# Altium PCB BearlyML Carrier Board.pcbdoc (part 2 of 2)
Units mil, origin at the board's own origin, x right, y up, seen from the top; angles counter-clockwise.
Board outline 9503.92 x 5409.44 mil, 6 copper layers (Top Layer, Mid-Layer 1, Mid-Layer 2, Mid-Layer 3, Mid-Layer 4, Bottom Layer); 88 components, 113 nets, 672 pads, 238 vias.
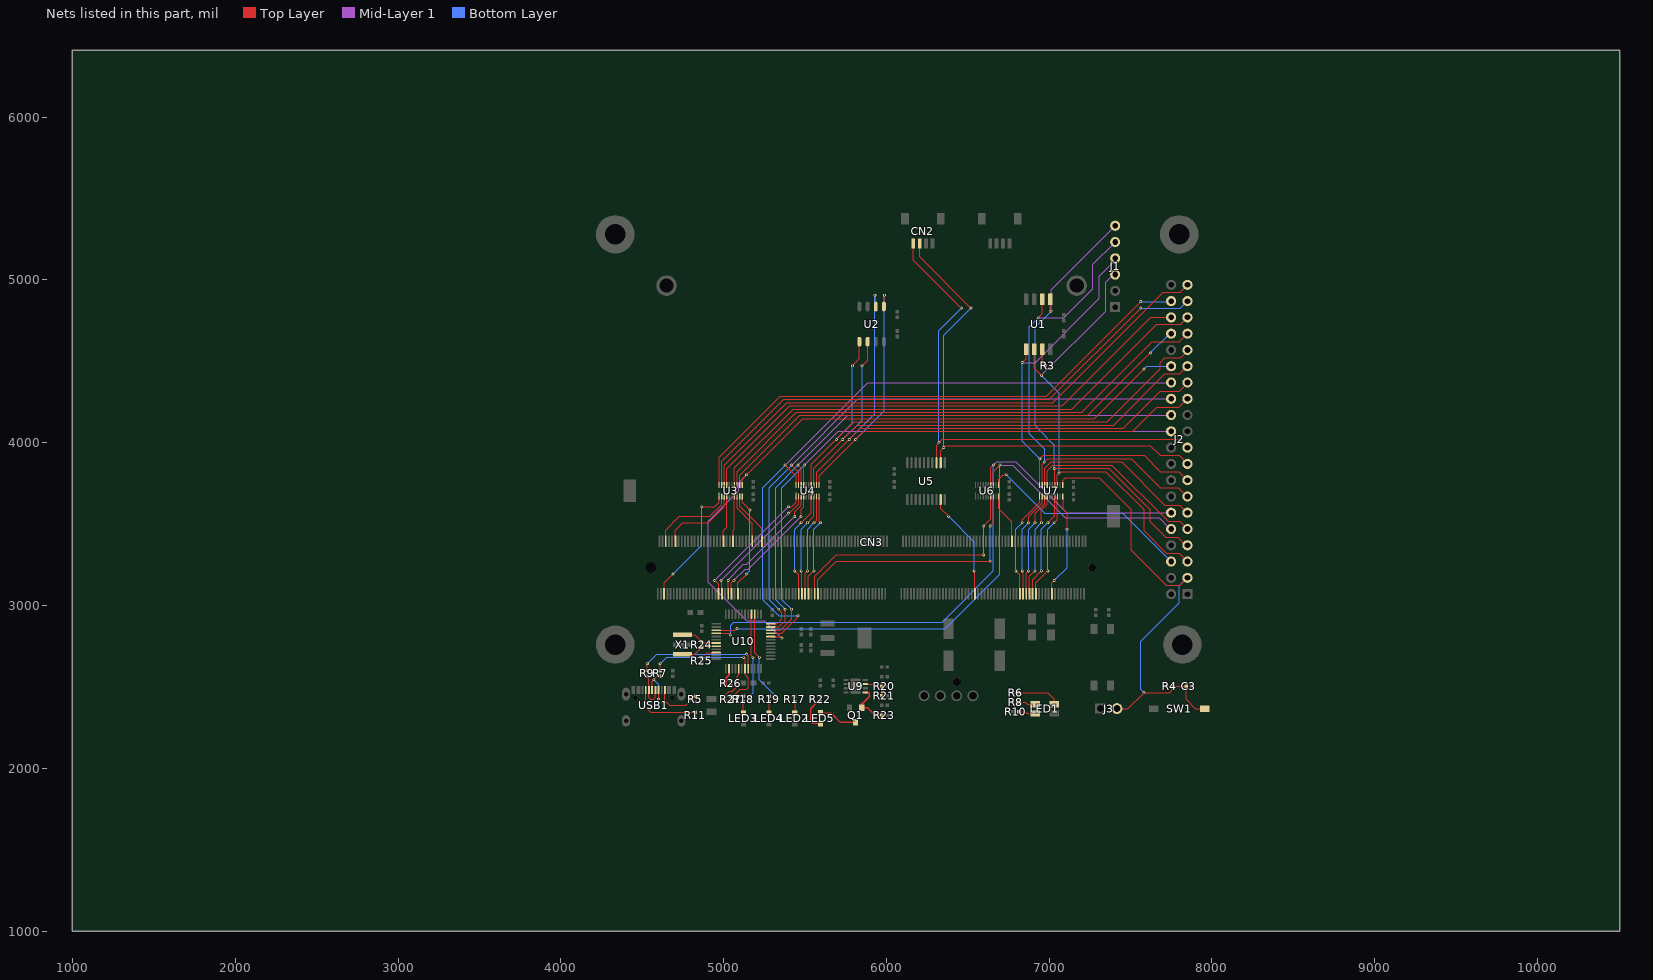
[diagram p6: the nets of this part, all layers, seen from the top]

## Via types
v1: diameter 17.72, hole 7.87, Top Layer to Bottom Layer, 238 vias

## Nets (pads, with @x,y where several pads share a name; then routed paths per layer and width w, separated by ;. In a path a pad name is that pad's centre, name@x,y a point inside that pad or via, vN(x,y) a via of type N, cw(c..) or ccw(c..) an arc to the next point about the centre after c; other vN are vias at no path point) (continued)
I2C1_SCL_3V3: CN2.4 J2.19 U5.13 | length 3086.9
  Top Layer w5.91: CN2.4@6165.33,5222.92 6165.33,5122.05 v1(6460.62,4826.76) ; U5.13@6308.07,3876.8 6308.07,3985.23 v1(6322.83,3999.99) ; v1@6322.84,3999.94 6342.51,4019.68 7799.24,4019.64 J2.19@7849.24,3969.64
  Bottom Layer w5.91: v1(6322.83,3999.99) 6322.83,4688.98 v1(6460.62,4826.76)
I2C1_SDA_1V8: CN3.191 U5.9 | length 665.1
  Top Layer w5.91: U5.9@6333.66,3650.74 6333.66,3595.46 v1(6381.88,3547.24) ; v1(6539.36,3212.59) 6544.28,3207.67 CN3.191@6544.28,3072.83
  Bottom Layer w5.91: v1(6381.88,3547.24) 6539.36,3389.76 v1(6539.36,3212.59)
I2C1_SDA_3V3: CN2.3 J2.17 U5.12 | length 3101.4
  Top Layer w5.91: CN2.3@6204.7,5222.92 6204.7,5141.74 v1(6519.68,4826.76) ; U5.12@6333.66,3876.8 6333.66,3951.78 v1(6352.35,3970.47) 6362.21,3980.33 7622.05,3980.33 7681.14,3921.24 7799.24,3921.24 7849.24,3871.24 J2.17@7849.24,3869.64
  Bottom Layer w5.91: v1(6352.35,3970.47) 6352.35,4659.44 v1(6519.68,4826.76)
JTAG_TCK_1V8: CN3.41 U4.2 | length 798.6
  Top Layer w5.91: v1(4984.25,3153.54) 4989.16,3148.62 CN3.41@4989.16,3072.83 ; v1(5397.63,3566.92) 5402.54,3566.94 5460.64,3625.04 U4.2@5460.59,3669.24
  Mid-Layer 1 w5.91: v1(4984.25,3153.54) v1(5397.63,3566.92)
JTAG_TCK_3V3: J2.26 U4.19 U10.24 | length 3756.3
  Top Layer w5.91: U10.24@5289.36,2887.81 5328.74,2887.8 5358.26,2917.32 5358.26,2956.69 v1(5338.58,2976.37) ; v1(5417.32,3862.2) 5460.62,3818.89 U4.19@5460.62,3740.16
  Mid-Layer 1 w5.91: v1(5417.32,3862.2) 5824.79,4269.68 J2.26@7749.2,4269.68
  Bottom Layer w5.91: v1(5338.58,2976.37) 5279.52,3035.43 5279.52,3468.5 5279.52,3724.41 v1(5417.32,3862.2)
JTAG_TDI_1V8: CN3.45 U4.3 | length 793.4
  Top Layer w5.91: CN3.45@5028.53,3072.83 v1(5028.53,3153.54) ; v1(5437,3547.24) 5437.04,3576.84 5476.34,3616.14 U4.3@5476.34,3669.24
  Mid-Layer 1 w5.91: v1(5028.53,3153.54) 5028.54,3158.44 5122.04,3251.94 5141.74,3251.94 v1(5437,3547.24)
JTAG_TDI_3V3: J2.24 U4.18 U10.23 | length 3691.2
  Top Layer w5.91: U10.23@5289.34,2868.14 5338.54,2868.14 5377.94,2907.44 v1@5377.94,2976.34 ; v1(5456.69,3862.2) 5476.37,3842.52 U4.18@5476.37,3740.16
  Mid-Layer 1 w5.91: v1(5456.69,3862.2) 5764.16,4169.68 J2.24@7749.2,4169.68
  Bottom Layer w5.91: v1@5377.95,2976.38 5318.89,3035.43 5318.89,3724.4 v1(5456.69,3862.2)
  other v1: 5377.95,2976.37
JTAG_TDO_1V8: CN3.47 U4.4 | length 791.9
  Top Layer w5.91: CN3.47@5048.21,3072.83 5048.21,3138.76 v1(5062.99,3153.54) ; v1@5476.34,3547.24 5476.34,3591.54 5492.14,3607.34 U4.4@5492.08,3669.24
  Mid-Layer 1 w5.91: v1@5062.94,3153.54 5131.84,3222.44 5151.54,3222.44 v1@5476.34,3547.24
  other v1: 5476.37,3547.24
JTAG_TDO_3V3: J2.22 U4.17 U10.22 | length 3645.7
  Top Layer w5.91: U10.22@5289.36,2848.44 5348.43,2848.43 5397.63,2897.64 5417.31,2917.32 v1(5417.32,2976.37) ; U4.17@5492.12,3740.16 5492.12,3858.26 v1(5496.06,3862.2)
  Mid-Layer 1 w5.91: v1(5496.06,3862.2) 5703.53,4069.67 J2.22@7749.2,4069.67
  Bottom Layer w5.91: v1(5417.32,2976.37) 5358.26,3035.43 5358.26,3625.98 5358.26,3724.4 v1(5496.06,3862.2)
JTAG_TMS_1V8: CN3.39 U4.1 | length 827.2
  Top Layer w5.91: v1(4944.88,3153.54) 4969.47,3128.95 CN3.39@4969.47,3072.83 ; v1(5397.63,3606.29) 5417.34,3606.34 5444.84,3633.84 U4.1@5444.84,3671.21
  Mid-Layer 1 w5.91: v1(4944.88,3153.54) v1(5397.63,3606.29)
JTAG_TMS_3V3: J2.28 U4.20 U10.21 | length 4090.4
  Top Layer w5.91: U10.21@5289.34,2828.74 5358.24,2828.74 5456.74,2927.14 v1(5456.69,2937) ; v1(5377.95,3862.2) 5417.32,3822.83 5444.88,3795.26 U4.20@5444.88,3740.16
  Mid-Layer 1 w5.91: v1@5377.94,3862.2 5885.42,4369.68 J2.28@7749.2,4369.68
  Bottom Layer w5.91: v1@5377.94,3862.24 5240.14,3724.44 5240.14,3035.44 5338.54,2937.04 v1@5456.64,2937.04
JTAG_TRST_1V8: CN3.51 U3.10 | length 646.6
  Top Layer w5.91: CN3.51@5087.58,3072.83 5087.58,3138.76 v1(5141.73,3192.91) ; U3.10@5114.16,3669.28 5114.16,3633.86 v1(5161.41,3586.61)
  Bottom Layer w5.91: v1(5141.73,3192.91) 5161.41,3212.59 v1(5161.41,3586.61)
JTAG_TRST_3V3: J2.30 U3.11 U10.20 | length 4383.7
  Top Layer w5.91: U3.11@5114.14,3740.14 5114.14,3775.54 5486.24,4147.64 7277.54,4147.64 v1@7582.64,4452.74 ; U10.20@5289.37,2809.04 5348.41,2809.04 v1(5358.26,2799.21)
  Mid-Layer 1 w5.91: v1(5141.73,3803.14) 5092.52,3753.93 5092.52,3704.73 4905.5,3517.71 4905.5,3143.7 5141.72,2907.48 5249.99,2907.48 v1(5358.26,2799.21)
  Bottom Layer w5.91: v1(7582.67,4452.75) 7599.56,4469.64 J2.30@7749.24,4469.64
Q1_3: LED5.2 Q1.3 | length 240.2
  Top Layer w9.84: LED5.2@5594.48,2338.58 5661.4,2338.59 5718.49,2281.49 Q1.3@5811.02,2281.5
QSPI0_CS_1V8: CN3.227 U7.7 | length 653.1
  Top Layer w5.91: CN3.227@6898.61,3072.83 6898.61,3158.45 v1(6952.75,3212.59) ; v1(6992.12,3507.87) 7035.43,3551.18 U7.7@7035.43,3669.28
  Bottom Layer w5.91: v1(6952.75,3212.59) 6952.75,3468.5 v1(6992.12,3507.87)
QSPI0_CS_3V3: J1.6 J2.7 U1.1 U7.14 | length 2980.2
  Top Layer w5.91: U1.1@7008.02,4881.92 7008.02,4810.85 v1(7011.76,4807.12) ; v1(7031.49,3842.51) 7035.44,3838.56 U7.14@7035.43,3740.11 ; v1(7031.49,3842.51) 7366.14,3842.54 7622.04,3586.64 7622.04,3512.84 7715.54,3419.24 7789.34,3419.24 7838.94,3369.64 J2.7@7849.24,3369.64
  Mid-Layer 1 w5.91: v1(7011.76,4807.12) 7011.76,4938.86 J1.6@7405.54,5332.64
  Bottom Layer w5.91: v1@7011.74,4807.16 6913.34,4708.76 6913.34,4103.36 7031.54,3985.16 v1(7031.49,3842.51)
QSPI0_DQ0_1V8: CN3.219 U7.1 | length 669
  Top Layer w5.91: v1(6795.27,3212.59) 6819.87,3187.99 CN3.219@6819.87,3072.83 ; v1@6834.64,3507.84 6834.64,3527.54 6940.94,3633.84 U7.1@6940.94,3671.21
  Bottom Layer w5.91: v1(6795.27,3212.59) 6795.27,3468.51 v1(6834.64,3507.87)
QSPI0_DQ0_3V3: J1.4 J2.15 U1.5 U7.20 | length 2790.5
  Top Layer w5.91: v1(6834.6,4492.16) 6858.03,4515.59 U1.5@6858.03,4574.84 ; U7.20@6940.94,3740.11 6940.94,3899.61 v1(6942.9,3901.57) 6962.59,3921.26 7582.66,3921.26 7681.08,3822.84 7796.04,3822.84 J2.15@7849.24,3769.64
  Mid-Layer 1 w5.91: v1(6834.6,4492.16) 6913.44,4492.16 7307.04,4885.76 7307.04,5023.56 7405.54,5122.06 J1.4@7405.54,5132.66
  Bottom Layer w5.91: v1(6834.6,4492.16) 6834.6,4009.87 v1(6942.9,3901.57)
QSPI0_DQ1_1V8: CN3.221 U7.2 | length 649
  Top Layer w5.91: v1(6834.64,3212.59) 6839.55,3207.68 CN3.221@6839.55,3072.83 ; v1@6874.04,3507.84 6874.04,3547.24 6956.64,3629.94 U7.2@6956.64,3669.24
  Bottom Layer w5.91: v1(6834.64,3212.59) 6834.64,3468.5 v1(6874.01,3507.87)
QSPI0_DQ1_3V3: J1.5 J2.13 U1.2 U7.19 | length 2953.8
  Top Layer w5.91: v1@6933.02,4767.75 6958.02,4792.75 U1.2@6958.02,4881.92 ; U7.19@6956.64,3740.14 6956.64,3866.09 v1(6972.43,3881.88) 6992.12,3901.57 7503.93,3901.57 7681.06,3724.44 7794.44,3724.44 J2.13@7849.24,3669.64
  Mid-Layer 1 w5.91: v1(6933.02,4767.75) 7090.54,4767.76 7267.74,4944.86 7267.74,5094.76 J1.5@7405.54,5232.66
  Bottom Layer w5.91: v1(6933.02,4767.75) 6878.94,4713.66 6878.94,4054.16 6972.44,3960.66 v1(6972.43,3881.88)
QSPI0_DQ2_1V8: CN3.223 U7.3 | length 643.5
  Top Layer w5.91: CN3.223@6859.24,3072.64 6859.24,3197.84 v1@6874.04,3212.54 ; v1@6913.34,3507.84 6913.34,3566.84 6972.44,3625.94 U7.3@6972.44,3669.24
  Bottom Layer w5.91: v1(6874.01,3212.59) 6874.01,3468.5 v1(6913.38,3507.87)
QSPI0_DQ2_3V3: J2.11 U7.18 | length 1124.7
  Top Layer w5.91: U7.18@6972.44,3740.11 6972.44,3842.54 7011.84,3881.84 7444.84,3881.84 7710.64,3616.14 7802.74,3616.14 J2.11@7849.24,3569.64
QSPI0_DQ3_1V8: CN3.225 U7.4 | length 641.7
  Top Layer w5.91: CN3.225@6878.92,3072.83 6878.92,3178.13 v1(6913.38,3212.59) ; v1@6952.74,3507.84 6952.74,3586.64 6988.14,3622.04 U7.4@6988.14,3669.24
  Bottom Layer w5.91: v1(6913.38,3212.59) 6913.38,3468.5 v1(6952.75,3507.87)
QSPI0_DQ3_3V3: J2.9 U7.17 | length 1126.1
  Top Layer w5.91: U7.17@6988.18,3740.15 6988.18,3828.74 7021.64,3862.2 7385.81,3862.2 7730.3,3517.71 7801.16,3517.71 J2.9@7849.2,3469.67
QSPI0_SCLK_1V8: CN3.229 U7.8 | length 651.5
  Top Layer w5.91: CN3.229@6918.29,3072.83 6918.29,3138.76 v1(6992.12,3212.59) ; v1(7031.49,3507.87) 7051.17,3527.55 U7.8@7051.17,3669.28
  Bottom Layer w5.91: v1(6992.12,3212.59) 6992.12,3468.5 v1(7031.49,3507.87)
QSPI0_SCLK_3V3: J1.3 J2.5 U1.6 U7.13 | length 2811.7
  Top Layer w5.91: U1.6@6908.03,4574.84 6908.03,4458.1 v1(6952.71,4413.42) ; U7.13@7051.18,3740.11 7051.18,3803.16 v1(7061.01,3812.99) ; v1@7061.04,3812.94 7070.84,3822.84 7346.44,3822.84 7582.64,3586.64 7582.64,3458.64 7720.44,3320.84 7798.04,3320.84 J2.5@7849.24,3269.64
  Mid-Layer 1 w5.91: v1(6952.71,4413.42) 7346.45,4807.16 7346.45,4984.24 7394.84,5032.64 J1.3@7405.54,5032.64
  Bottom Layer w5.91: v1(6952.71,4413.42) 7061.01,4305.12 v1(7061.01,3812.99)
R3_1: R3.1 U1.7 | length 109.4
  Top Layer w5.91: U1.7@6958.02,4574.84 6958.02,4489.48 R3.1@6975.03,4472.47
R5_1: R5.1 USB1.B5 | length 301.9
  Top Layer w5.91: USB1.B5@4639.74,2480.94 4639.74,2415.34 4669.24,2385.84 4767.74,2385.84 4787.44,2405.54 4787.44,2425.24 4807.04,2444.84 4824.14,2444.84 R5.1@4826.74,2442.24
R6_1: LED1.3 R6.1 | length 266.9
  Top Layer w5.91: R6.1@6812.28,2464.54 6992.14,2464.54 7031.44,2425.24 LED1.3@7031.44,2393.74
R7_1: R7.1 USB1.A6 USB1.B6 | length 301.1
  Top Layer w5.91: USB1.A6@4561.02,2480.91 4561.02,2533.46 v1(4570.86,2543.3) 4593.2,2565.64 R7.1@4610.23,2565.64 ; v1(4600.39,2425.19) USB1.B6@4600.39,2480.91
  Bottom Layer w5.91: v1(4570.86,2543.3) 4600.39,2513.78 v1(4600.39,2425.19)
R8_1: LED1.1 R8.1 | length 106
  Top Layer w5.91: R8.1@6812.28,2405.54 6854.32,2405.51 6866.13,2393.7 LED1.1@6913.39,2393.7
R9_1: R9.1 USB1.A7 USB1.B7 | length 228.1
  Top Layer w5.91: R9.1@4531.54,2565.6 4541.33,2555.8 USB1.B7@4541.33,2480.91 4541.33,2435.04 4551.18,2425.2 4570.86,2425.2 4580.7,2435.03 USB1.A7@4580.7,2480.91
R10_1: LED1.2 R10.1 | length 104.3
  Top Layer w5.91: R10.1@6812.28,2346.44 6854.32,2346.45 6862.19,2338.58 LED1.2@6913.39,2338.58
R11_1: R11.1 USB1.A5 | length 423.4
  Top Layer w5.91: USB1.A5@4521.65,2480.91 4521.65,2375.98 4553.82,2343.81 R11.1@4826.77,2343.81
R17_2: LED2.2 R17.2 | length 69.6
  Top Layer w5.91: LED2.2@5437,2338.59 R17.2@5437.04,2408.2
R18_2: LED3.2 R18.2 | length 69.6
  Top Layer w5.91: LED3.2@5122.04,2338.58 R18.2@5122.04,2408.2
R19_2: LED4.2 R19.2 | length 69.6
  Top Layer w5.91: LED4.2@5279.52,2338.58 R19.2@5279.54,2408.2
R21_2: R20.1 R21.2 U9.7 | length 165.7
  Top Layer w5.91: U9.7@5869.8,2516.76 5916.31,2516.75 5929.12,2503.93 R20.1@5971.1,2503.94 ; R21.2@5971.14,2444.88 R20.1@5971.1,2503.94
R22_1: LED5.1 R22.1 | length 219.1
  Top Layer w9.84: LED5.1@5594.48,2275.59 5547.24,2275.59 5535.43,2287.4 5535.43,2366.14 5577.44,2408.16 R22.1@5594.48,2408.16
R23_1: Q1.1 R23.1 U9.5 | length 275.4
  Top Layer w9.84: Q1.1@5848.42,2372.05 5883.85,2372.05 5929.12,2326.77 R23.1@5971.14,2326.76
  Top Layer w11.81: Q1.1@5848.44,2372.06 5848.44,2393.66 5894.64,2439.96 5894.64,2459.66 5888.74,2465.56 U9.5@5869.8,2465.57
R24_1: R24.1 U10.43 X1.1 | length 227.1
  Top Layer w5.91: X1.1@4748.05,2818.9 4824.13,2818.89 R24.1@4866.14,2776.88 4873.33,2769.69 U10.43@4954.72,2769.7
R24_2: R24.2 U10.44 X1.3 | length 227.1
  Top Layer w5.91: X1.3@4748.05,2700.79 4824.12,2700.78 R24.2@4866.14,2742.8 4873.34,2750 U10.44@4954.72,2750.01
R25_2: R25.2 U10.46 | length 101.9
  Top Layer w5.91: R25.2@4866.14,2678.48 4898.3,2710.63 U10.46@4954.72,2710.64
R26_2: R26.2 U10.2 | length 139.1
  Top Layer w11.81: U10.2@5033.46,2612.22 5033.47,2572.84 5013.77,2553.15 5013.77,2513.78 5020.98,2506.57 R26.2@5043.34,2506.6
R27_2: R27.2 U10.5 | length 267.9
  Top Layer w5.91: R27.2@5043.34,2408.14 5030.84,2408.14 5013.74,2425.24 5013.74,2454.74 5033.44,2474.44 5053.14,2474.44 5082.64,2503.94 5082.64,2562.94 5092.54,2572.84 U10.5@5092.51,2612.22
RESET_1V8: CN3.239 U7.10 | length 646.6
  Top Layer w5.91: CN3.239@7016.72,3072.83 7016.72,3138.78 v1(7031.49,3153.54) ; U7.10@7082.66,3669.28 7082.67,3594.48 7110.22,3566.93 v1(7110.22,3468.5)
  Bottom Layer w5.91: v1(7031.49,3153.54) 7110.22,3232.27 v1(7110.22,3468.5)
RESET_3V3: C3.2 J2.3 J3.2 R4.2 SW1.1 U7.11 | length 2780.9
  Top Layer w5.91: U7.11@7082.64,3740.14 7082.64,3765.74 7100.34,3783.44 7307.14,3783.44 7503.94,3586.64 7503.94,3340.54 7720.44,3124.04 7803.54,3124.04 J2.3@7849.24,3169.64 ; J3.2@7416.14,2366.14 7484.24,2366.14 7582.64,2464.54 7740.14,2464.54 7757.14,2481.64 R4.2@7757.14,2503.94 ; R4.2@7757.19,2503.93 C3.2@7841.2,2503.94 7841.21,2422.55 7897.62,2366.14 SW1.1@7954.71,2366.14
  Bottom Layer w5.91: v1(7582.67,2464.56) 7562.98,2484.25 7562.98,2779.53 7799.2,3015.74 7799.2,3119.67 J2.3@7849.2,3169.67
RXLED: R18.1 U10.28 | length 554.7
  Top Layer w5.91: R18.1@5122.04,2442.24 5124.68,2444.88 v1(5161.41,2444.88) ; U10.28@5171.25,2946.85 5171.25,2690.95 v1(5181.1,2681.1)
  Bottom Layer w5.91: v1(5161.41,2444.88) 5181.1,2464.57 v1(5181.1,2681.1)
S$50: 
S$54: 
S$56: 
S$58: 
S$17923: 
S$36663: 
S$36667: 
S$36675: 
S$64641: 
SPI1_CS_1V8: CN3.95 U4.10 | length 630.3
  Top Layer w5.91: CN3.95@5520.65,3072.83 5520.65,3178.14 v1(5555.11,3212.59) ; U4.10@5586.61,3669.29 5586.61,3515.74 v1(5594.48,3507.87)
  Bottom Layer w5.91: v1(5555.11,3212.59) 5555.11,3468.5 v1(5594.48,3507.87)
SPI1_CS_3V3: J2.25 U2.1 U4.11 | length 3546.5
  Top Layer w5.91: U4.11@5586.57,3740.11 5586.64,3795.3 v1(5811.02,4019.68) 5860.28,4068.94 7513.74,4068.94 7661.44,4216.54 7796.04,4216.54 J2.25@7849.24,4269.64 ; U2.1@5984.44,4833.95 5988.18,4837.69 v1(5988.18,4905.5)
  Bottom Layer w5.91: v1(5811.02,4019.68) 5988.18,4196.84 v1(5988.18,4905.5)
SPI1_MISO_1V8: CN3.93 U4.9 | length 625.4
  Top Layer w5.91: CN3.93@5500.97,3072.83 5500.97,3197.82 v1(5515.74,3212.59) ; v1(5555.11,3507.87) 5570.86,3523.62 U4.9@5570.86,3669.29
  Bottom Layer w5.91: v1(5515.74,3212.59) 5515.74,3468.5 v1(5555.11,3507.87)
SPI1_MISO_3V3: J2.27 U2.2 U4.12 | length 3612.8
  Top Layer w5.91: U4.12@5570.82,3740.11 5570.84,3818.87 v1(5771.65,4019.68) 5840.51,4088.54 7454.74,4088.54 7681.14,4314.94 7799.24,4314.94 7849.24,4364.94 J2.27@7849.24,4369.64 ; v1(5929.13,4905.5) 5934.44,4900.19 U2.2@5934.44,4833.95
  Bottom Layer w5.91: v1(5771.65,4019.68) 5929.13,4177.16 v1(5929.13,4905.5)
SPI1_MOSI_1V8: CN3.89 U4.7 | length 649
  Top Layer w5.91: v1(5437,3212.59) 5461.6,3187.99 CN3.89@5461.6,3072.83 ; v1(5476.37,3507.87) 5539.36,3570.86 U4.7@5539.36,3669.29
  Bottom Layer w5.91: v1(5437,3212.59) 5437,3468.5 v1(5476.37,3507.87)
SPI1_MOSI_3V3: J2.31 U2.5 U4.14 | length 3416.6
  Top Layer w5.91: U4.14@5539.33,3740.11 5539.34,3866.11 v1(5692.91,4019.68) ; v1@5692.94,4019.64 5801.14,4127.94 7356.24,4127.94 7681.14,4452.74 7681.14,4492.14 7710.64,4521.64 7809.04,4521.64 7849.24,4561.84 J2.31@7849.24,4569.64 ; v1(5791.33,4472.43) 5834.44,4515.55 U2.5@5834.44,4622.73
  Bottom Layer w5.91: v1(5692.91,4019.68) 5791.33,4118.1 v1(5791.33,4472.43)
SPI1_SCLK_1V8: CN3.91 U4.8 | length 631.1
  Top Layer w5.91: v1(5476.37,3212.59) 5481.28,3207.68 CN3.91@5481.28,3072.83 ; v1(5515.74,3507.87) 5555.11,3547.24 U4.8@5555.11,3669.28
  Bottom Layer w5.91: v1(5476.37,3212.59) 5476.37,3468.5 v1(5515.74,3507.87)
SPI1_SCLK_3V3: J2.29 U2.6 U4.13 | length 3322.3
  Top Layer w5.91: U4.13@5555.08,3740.11 5555.14,3842.54 v1(5732.28,4019.68) 5820.84,4108.24 7395.64,4108.24 7710.64,4423.24 7802.74,4423.24 J2.29@7849.24,4469.64 ; v1(5850.39,4472.43) 5884.44,4506.49 U2.6@5884.44,4622.73
  Bottom Layer w5.91: v1(5732.28,4019.68) 5850.39,4137.79 v1(5850.39,4472.43)
SYS_CLK_EXT_1V8: CN3.214 U6.10 | length 307.4
  Top Layer w5.91: U6.10@6688.97,3669.28 6688.97,3594.49 6770.66,3512.79 CN3.214@6770.66,3395.67
SYS_CLK_EXT_3V3: J2.6 U6.11 | length 1328.1
  Top Layer w5.91: U6.11@6688.94,3740.14 6688.94,3775.54 6716.54,3803.14 v1(6736.21,3803.14)
  Bottom Layer w5.91: v1(6736.21,3803.14) 6972.44,3566.94 7451.94,3566.94 J2.6@7749.24,3269.64
TL_CLK_1V8: CN3.12 U3.3 | length 490.1
  Top Layer w5.91: CN3.12@4703.74,3395.64 4703.74,3463.54 4748.04,3507.84 4905.44,3507.84 5003.94,3606.34 U3.3@5003.94,3669.24
TL_CLK_3V3: J2.39 U3.18 | length 3426.1
  Top Layer w5.91: U3.18@5003.94,3740.11 5003.94,3862.24 5387.74,4246.04 7021.64,4246.04 7700.74,4925.14 7804.74,4925.14 J2.39@7849.24,4969.64
TL_IN_DAT_1V8: CN3.6 U3.2 | length 525.4
  Top Layer w5.91: CN3.6@4644.64,3395.64 4644.64,3463.54 4728.34,3547.24 4915.34,3547.24 4988.14,3620.04 U3.2@4988.14,3669.24
TL_IN_DAT_3V3: J2.37 U3.19 | length 3414.2
  Top Layer w5.91: U3.19@4988.14,3740.14 4988.14,3885.74 5368.14,4265.74 7001.94,4265.74 v1@7562.94,4826.74
  Bottom Layer w5.91: v1(7562.98,4826.76) 7806.29,4826.77 J2.37@7849.2,4869.68
TL_IN_RDY_1V8: CN3.60 U3.8 | length 312.3
  Top Layer w5.91: U3.8@5082.64,3669.24 5082.64,3596.44 5176.14,3502.94 CN3.60@5176.14,3395.64
TL_IN_RDY_3V3: J2.33 U3.13 | length 3200.1
  Top Layer w5.91: U3.13@5082.64,3740.14 5082.64,3822.84 5446.84,4187.04 7198.84,4187.04 7631.84,4620.04 7799.64,4620.04 J2.33@7849.24,4669.64
TL_IN_VAL_1V8: CN3.48 U3.7 | length 277.3
  Top Layer w5.91: CN3.48@5058.04,3395.64 5058.04,3463.54 5066.94,3472.44 U3.7@5066.93,3669.24
TL_IN_VAL_3V3: J2.35 U3.14 | length 3271
  Top Layer w5.91: U3.14@5066.93,3740.11 5066.94,3846.44 5427.14,4206.64 7139.74,4206.64 7661.44,4728.34 7807.84,4728.34 J2.35@7849.24,4769.64
TL_OUT_DAT_1V8: CN3.5 U3.1 | length 784.4
  Top Layer w5.91: CN3.5@4634.83,3072.83 4634.83,3138.77 v1(4688.97,3192.91) ; v1(4866.14,3606.29) 4944.88,3606.3 4972.44,3633.86 U3.1@4972.44,3671.21
  Bottom Layer w5.91: v1(4688.97,3192.91) 4866.13,3370.07 v1(4866.14,3606.29)
TL_OUT_DAT_3V3: J2.38 U3.20 | length 3343.8
  Top Layer w5.91: U3.20@4972.44,3740.11 4972.44,3909.44 5348.44,4285.44 6982.24,4285.44 v1@7562.94,4866.14
  Bottom Layer w5.91: v1(7562.98,4866.13) 7745.66,4866.13 J2.38@7749.2,4869.67
TL_OUT_RDY_1V8: CN3.66 U3.9 | length 330.3
  Top Layer w5.91: U3.9@5098.42,3669.24 5098.44,3610.24 5235.24,3473.44 CN3.66@5235.24,3395.64
TL_OUT_RDY_3V3: J2.34 U3.12 | length 3070.4
  Top Layer w5.91: U3.12@5098.42,3740.11 5098.44,3799.24 5466.54,4167.34 7238.14,4167.34 v1@7622.04,4551.14
  Bottom Layer w5.91: v1@7622.04,4551.14 7740.54,4669.64 J2.34@7749.24,4669.64
  other v1: 7622.04,4551.17
TL_OUT_VAL_1V8: CN3.42 U3.4 | length 282.1
  Top Layer w5.91: CN3.42@4999.04,3395.64 4999.04,3458.64 5019.64,3479.24 U3.4@5019.64,3669.24
TL_OUT_VAL_3V3: J2.36 U3.17 | length 3213.7
  Top Layer w5.91: U3.17@5019.64,3740.14 5019.64,3838.54 5407.44,4226.34 7080.74,4226.34 7624.04,4769.64 J2.36@7749.24,4769.64
TXLED: R19.1 U10.27 | length 595.3
  Top Layer w5.91: U10.27@5190.94,2946.85 5190.94,2710.63 v1(5220.47,2681.1) ; R19.1@5279.52,2442.24 5282.16,2444.88 v1(5318.89,2444.88)
  Bottom Layer w5.91: v1@5220.44,2681.14 5220.44,2542.84 v1@5318.44,2444.84
UART0_RX_1V8: CN3.101 U6.8 | length 1596.3
  Top Layer w5.91: CN3.101@5579.74,3072.84 5579.74,3158.44 5692.94,3271.64 v1@6637.74,3271.64 ; v1@6637.74,3488.14 6657.44,3507.84 U6.8@6657.44,3669.24
  Bottom Layer w5.91: v1(6637.79,3271.65) v1(6637.79,3488.18)
UART0_RX_3V3: J2.10 U6.13 U10.39 | length 3907.8
  Top Layer w5.91: U10.39@4954.72,2848.44 5072.84,2848.43 v1(5082.67,2858.26) ; U6.13@6657.44,3740.14 6657.44,3822.84 v1(6696.84,3862.2)
  Mid-Layer 1 w5.91: v1(6696.84,3862.2) 6775.58,3862.2 7100.34,3537.44 7676.14,3537.44 7744.44,3469.14 J2.10@7749.24,3469.64
  Bottom Layer w5.91: v1(5082.67,2858.26) 6362.19,2858.26 6696.84,3192.91 v1(6696.84,3862.2)
UART0_TX_1V8: CN3.99 U6.7 | length 1574.9
  Top Layer w5.91: CN3.99@5560.02,3072.83 5560.02,3178.14 5692.9,3311.02 v1(6598.42,3311.02) ; v1@6598.44,3488.14 6641.74,3531.44 U6.7@6641.73,3669.24
  Bottom Layer w5.91: v1(6598.42,3311.02) v1(6598.42,3488.18)
UART0_TX_3V3: J2.12 U6.14 U10.40 | length 3911.9
  Top Layer w5.91: U10.40@4954.73,2828.74 5033.45,2828.74 v1(5043.3,2818.89) ; U6.14@6641.73,3740.15 6641.73,3846.45 v1(6657.47,3862.2)
  Mid-Layer 1 w5.91: v1(6657.47,3862.2) 6677.16,3881.89 6795.27,3881.89 7107.51,3569.64 J2.12@7749.24,3569.64
  Bottom Layer w5.91: v1(5043.3,2818.89) 5043.3,2877.95 5062.98,2897.64 6342.51,2897.64 6657.47,3212.59 v1(6657.47,3862.2)
USBDM: R9.2 U10.8 | length 769.4
  Top Layer w5.91: R9.2@4531.54,2599.68 v1(4531.49,2641.73) ; v1(5141.73,2700.78) 5151.57,2690.94 U10.8@5151.57,2612.22
  Bottom Layer w5.91: v1(4531.49,2641.73) 4590.54,2700.78 v1(5141.73,2700.78)
USBDP: R7.2 R27.1 U10.7 | length 899.1
  Top Layer w5.91: R7.2@4610.23,2599.72 v1(4610.23,2641.73) ; R27.1@5043.3,2442.24 5060.35,2442.24 5102.35,2484.25 5141.73,2484.25 5151.57,2494.09 5151.57,2553.15 5131.89,2572.83 U10.7@5131.88,2612.22 5131.88,2671.26 v1(5122.04,2681.1)
  Bottom Layer w5.91: v1(4610.23,2641.73) 4649.6,2681.1 v1(5122.04,2681.1)
pads on no net: CN3. CN3.9 CN3.11 CN3.15 CN3.16 CN3.17 CN3.18 CN3.21 CN3.22 CN3.23 CN3.24 CN3.27 CN3.28 CN3.29 CN3.30 CN3.33 CN3.34 CN3.35 CN3.36 CN3.52 CN3.53 CN3.54 CN3.57 CN3.59 CN3.63 CN3.65 CN3.69 CN3.70 CN3.71 CN3.72 CN3.75 CN3.76 CN3.77 CN3.78 CN3.81 CN3.82 CN3.83 CN3.84 CN3.88 CN3.90 CN3.92 CN3.94 CN3.96 CN3.97 CN3.98 CN3.100 CN3.103 CN3.104 CN3.105 CN3.106 CN3.108 CN3.109 CN3.110 CN3.111 CN3.112 CN3.114 CN3.115 CN3.116 CN3.117 CN3.120 CN3.121 CN3.122 CN3.123 CN3.127 CN3.128 CN3.130 CN3.131 CN3.133 CN3.134 CN3.136 CN3.137 CN3.139 CN3.140 CN3.142 CN3.143 CN3.145 CN3.148 CN3.149 CN3.150 CN3.151 CN3.154 CN3.155 CN3.156 CN3.157 CN3.160 CN3.161 CN3.162 CN3.163 CN3.166 CN3.167 CN3.168 CN3.169 CN3.172 CN3.173 CN3.174 CN3.175 CN3.178 CN3.179 CN3.180 CN3.181 CN3.182 CN3.183 CN3.184 CN3.186 CN3.188 CN3.190 CN3.192 CN3.193 CN3.194 CN3.195 CN3.196 CN3.197 CN3.198 CN3.199 CN3.202 CN3.203 CN3.204 CN3.205 CN3.206 CN3.207 CN3.208 CN3.209 CN3.211 CN3.212 CN3.213 CN3.215 CN3.216 CN3.218 CN3.220 CN3.222 CN3.224 CN3.226 CN3.228 CN3.230 CN3.232 CN3.233 CN3.234 CN3.235 CN3.236 CN3.237 CN3.238 CN4. CN4.3 CN4.4 U2.3 U2.7 U5.1 U5.3 U5.4 U5.5 U5.16 U5.17 U5.18 U5.20 U10.1 U10.11 U10.12 U10.13 U10.15 U10.16 U10.17 U10.19 U10.29 U10.30 U10.32 U10.33 U10.35 U10.36 U10.37 U10.38 U10.41 U10.48 USB1. USB1.A8 USB1.B8
copper on no net: | length 0.1

## Polygon pours and split planes (outlines as drawn)
GND on Bottom Layer "Bottom Layer-GND" (solid, pour order 0): 3074.8,5909.44 3074.8,1500 10003.92,1500 10003.92,5909.44
GND on Mid-Layer 4 "Mid-Layer 4-GND" (solid, pour order 1): 2759.84,5909.44 2759.84,1500 9688.96,1500 9688.96,5909.44
1V8 on Mid-Layer 3 "Mid-Layer 3-1V8" (solid, pour order 2): 2444.88,5909.44 2444.88,1500 9374,1500 9374,5909.44
5V on Mid-Layer 3 "Mid-Layer 3-5V" (solid, pour order 3): 4492.12,2996.06 4492.12,2129.92 6381.88,2129.92 6381.88,2464.57 5751.96,2464.57 5751.96,2996.06
3V3 on Mid-Layer 2 "Mid-Layer 2-3V3" (solid, pour order 4): 2129.92,5909.44 2129.92,1500 9059.04,1500 9059.04,5909.44
GND on Mid-Layer 1 "Mid-Layer 1-GND" (solid, pour order 5): 1814.96,5909.44 1814.96,1500 8744.08,1500 8744.08,5909.44
GND on Top Layer "Top Layer-GND" (solid, pour order 6): 1500,5909.44 1500,1500 8429.12,1500 8429.12,5909.44
3V3 on Top Layer "Top Layer-3V3" (solid, pour order 7): 7139.75,3291.34 7139.75,3488.18 7267.7,3488.18 7267.7,3291.34
1V8 on Top Layer "Top Layer-1V8" (solid, pour order 8): 7129.91,3133.86 7129.91,3035.43 7090.54,2996.06 6972.43,2996.06 6972.43,2740.16 7248.02,2740.16 7248.02,3133.86

## Silkscreen, mask and mechanical layers (free items; w line width, h text height)
Top Overlay:
  lines w3.94: 7169.28,2612.2 7179.12,2602.36 7179.12,2759.84 7169.28,2750 ; 7484.24,2612.2 7474.4,2602.36 7474.4,2759.84 7484.24,2750 ; 7616.41,3470.84 7596.71,3470.84 7596.71,3569.64 7616.41,3569.64 ; 7996.04,3773.64 8015.74,3773.64 8015.74,3271.64 8000.97,3271.65 ; 7996.04,3871.64 8015.74,3871.64 8015.74,3970.44 7996.04,3970.44 ; 7996.04,4071.64 8015.74,4071.64 8015.74,4170.44 7996.04,4170.44 ; 7996.04,4271.64 8015.74,4271.64 8015.74,4570.84 8005.89,4570.86
  text "Flash Prog" at 6992.12,5326.76 h62.99 r357
  text "CS" at 7302.16,5320.86 h39.37
  text "Hdr" at 6992.12,5259.83 h62.99
  text "MISO" at 7252.94,5220.86 h39.37
  text "I2C1" at 6106.29,5131.88 h62.99
  text "I2C0" at 6578.73,5131.88 h62.99
  text "MOSI" at 7252.94,5120.86 h39.37
  text "SCLK" at 7252.94,5020.86 h39.37
  text "TL_CLK" at 7905.89,4950.8 h39.37
  text "GND" at 7607.27,4949.8 h39.37
  text "3V3" at 7272.63,4920.86 h39.37
  text "Rev1" at 4511.81,4905.5 h47.24 r89
  text "OUT_DAT" at 7523.61,4851.37 h39.37
  text "IN_DAT" at 7905.89,4850.8 h39.37
  text "GND" at 7262.79,4821.84 h39.37
  text "OUT_VAL" at 7523.61,4752.95 h39.37
  text "IN_VAL" at 7905.89,4750.8 h39.37
  text "IN_RDY" at 7905.89,4650.8 h39.37
  text "OUT_RDY" at 7518.69,4649.6 h39.37
  text "MOSI" at 7907.67,4554.18 h39.37
  text "GND" at 7607.27,4549.8 h39.37
  text "CARRIER BOARD" at 4452.75,4452.75 h78.74 r90
  text "SCLK" at 7910.03,4451.59 h39.37
  text "JTRST" at 7582.67,4447.83 h39.37
  text "MISO" at 7910.03,4351.59 h39.37
  text "JTMS" at 7597.43,4349.4 h39.37
  text "CS" at 7910.03,4251.59 h39.37
  text "JTCK" at 7607.27,4249.8 h39.37 r1
  text "UC Berkeley EE 194" at 6519.67,4177.16 h47.24 r359
  text "SCL" at 7914.95,4155.53 h39.37
  text "JTDI" at 7612.19,4147.63 h39.37
  text "2022-12-20" at 6519.67,4118.11 h47.24
  text "SDA" at 7914.95,4055.53 h39.37
  text "JTDO" at 7602.35,4049.21 h39.37
  text "SODIMM IO Level 1.8V" at 6519.67,4039.37 h47.24
  text "EE194 Bringup" at 4314.96,3999.99 h157.48 r87
  text "SCL" at 7914.95,3955.53 h39.37
  text "PA0" at 7617.11,3950.78 h39.37
  text "SDA" at 7914.95,3855.53 h39.37
  text "PA1" at 7617.11,3847.44 h39.37
  text "DQ0" at 7914.95,3755.53 h39.37 r357
  text "PA2" at 7617.11,3749.01 h39.37
  text "DQ1" at 7914.95,3655.53 h39.37
  text "PA3" at 7617.11,3650.59 h39.37
  text "TX" at 7637.59,3549.61 h39.37
  text "DQ2" at 7914.16,3550.42 h39.37
  text "DQ3" at 7914.95,3455.53 h39.37
  text "RX" at 7632.67,3449.61 h39.37
  text "CS" at 7914.95,3355.53 h39.37
  text "DEBUG_CLK" at 7475.18,3349.61 h39.37
  text "SCLK" at 7912.39,3256.89 h39.37
  text "SYS_CLK" at 7534.24,3249.61 h39.37
  text "RESET" at 7914.95,3155.53 h39.37
  text "BOOT_SEL" at 7499.79,3154.53 h39.37
  text "GND" at 7914.95,3055.53 h39.37
  text "3V3" at 7607.27,3049.8 h39.37
  text "Boot" at 7070.85,2887.79 h62.99 r359
  text "Write" at 7464.55,2887.79 h62.99
  text "Mode" at 7070.85,2828.73 h62.99
  text "Protect" at 7464.55,2828.73 h62.99
  text "QSPI" at 7051.17,2740.16 h47.24
  text "EN" at 7503.93,2740.15 h47.24
  text "HALT" at 7041.33,2582.67 h47.24
  text "OFF" at 7503.93,2582.67 h47.24
  text "RX" at 5082.67,2248.03 h62.99 r90
  text "TX" at 5240.15,2248.03 h62.99 r90
  text "3V3" at 5397.63,2248.03 h62.99 r90
  text "1V8" at 5555.11,2248.03 h62.99 r90
  text "CPU FAN" at 6175.19,2238.18 h62.99
  text "EXT RESET" at 7257.86,2238.19 h62.99
  text "RESET" at 7671.25,2238.18 h62.99
  text "JLCJLCJLCJLC" at 4423.22,2228.34 h55.12
Bottom Overlay:
  text "Note:" at 7405.5,3527.55 h47.24 r1
  text "The I2C level shifter might NOT work with the chip's wrong polarity. If so, try to remove U5" at 7405.5,3468.5 h47.24
  text "When programming U1, remove the Module Board from CN3" at 7405.5,3409.44 h47.24
  text "U2 is NOT compatible with the TF card on the BearlyML Module Board. Do NOT insert TF card when U2 is populated." at 7405.5,3350.39 h47.24
  text "Becareful with ESD. Always Earth all the instruments used in the test setup, and also yourself." at 7405.5,3291.33 h47.24
  text "Designed in California" at 7405.5,2877.95 h47.24
  text "PCB Art Credit to @Ritspoon" at 7405.5,2661.41 h47.24
  text "https://www.reddit.com/r/berkeley/comments/ygf9iy/waifulized_oski_part_two_i_coloured_it_this_time/" at 7405.5,2602.36 h47.24

## Text inside footprints (layer, text, board x,y; h text height)
CN3: Top Overlay "FOXCONN" at 7188.97,3269.68 h39.37 r180; Top Overlay "DATE CODE" at 6017.71,3269.68 h39.37 r180; Top Overlay "DDR4" at 4826.76,3269.68 h39.37 r180
SW2: Top Overlay "1" at 7266.77,2584.64 h39.37 r180; Top Overlay "2" at 7366.77,2584.64 h39.37 r180; Top Overlay "ON" at 7226.77,2730.26 h39.37